# Altium PCB PQFP FPGA Fan-Out.PcbDoc
Units mil, origin at the board's own origin, x right, y up, seen from the top; angles counter-clockwise.
Board outline 1225.26 x 1034.53 mil, 2 copper layers (Top Layer, Bottom Layer); 15 components, 0 nets, 174 pads, 56 vias.
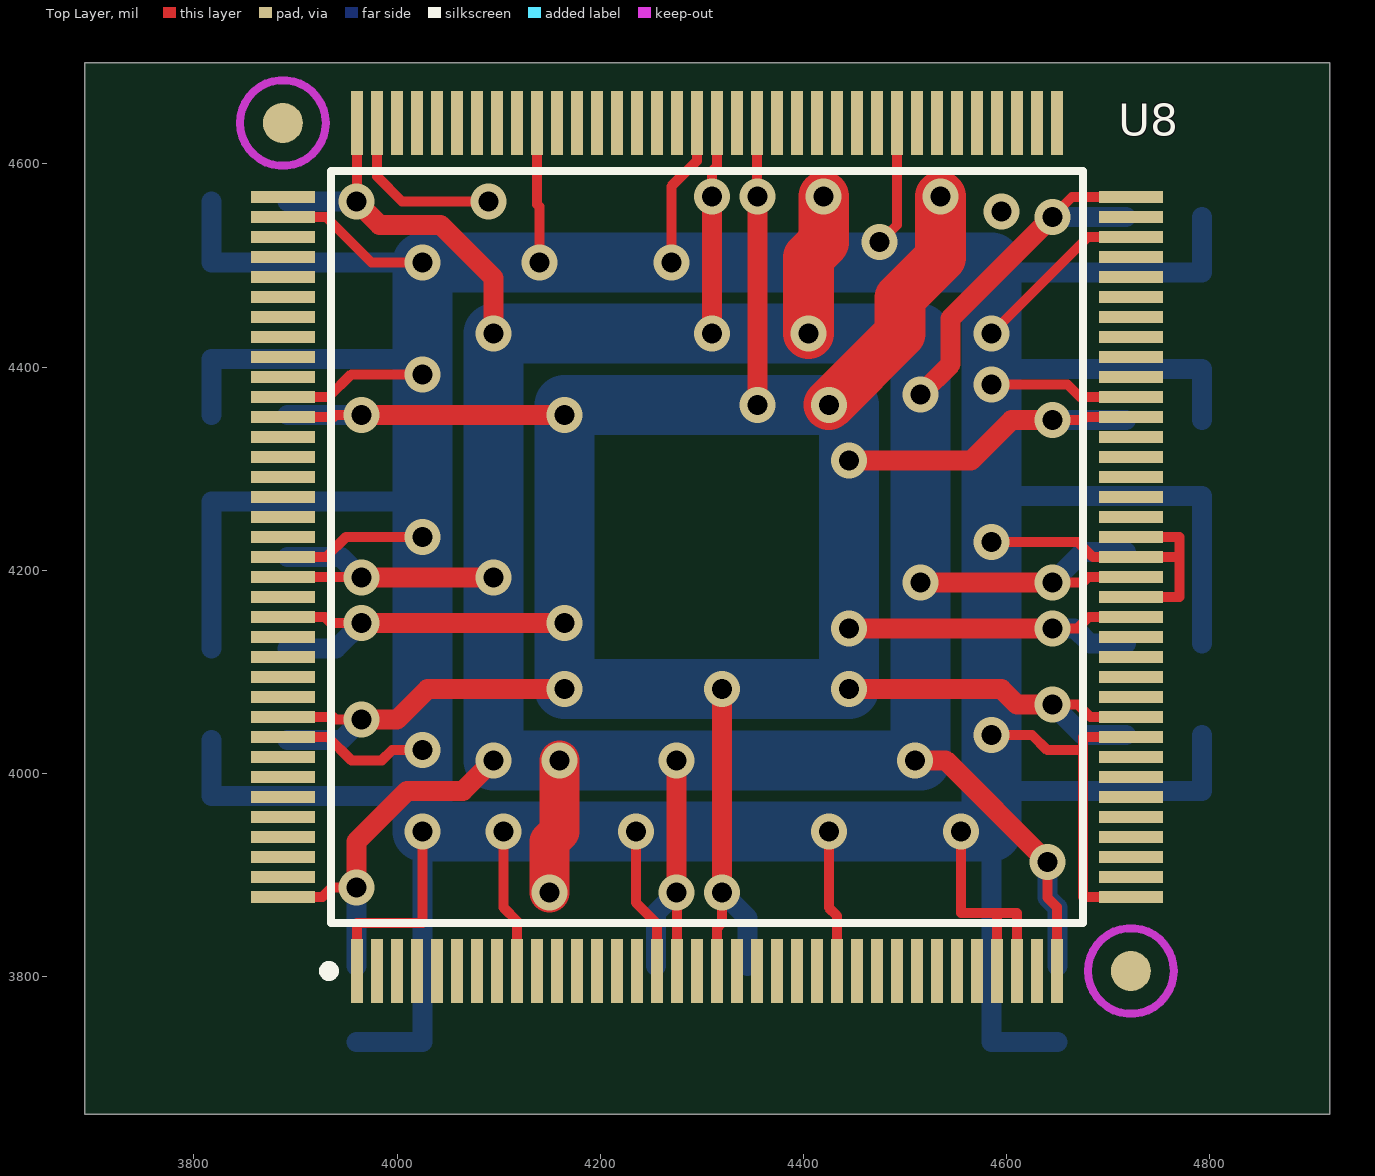
[diagram p0: Top Layer view]
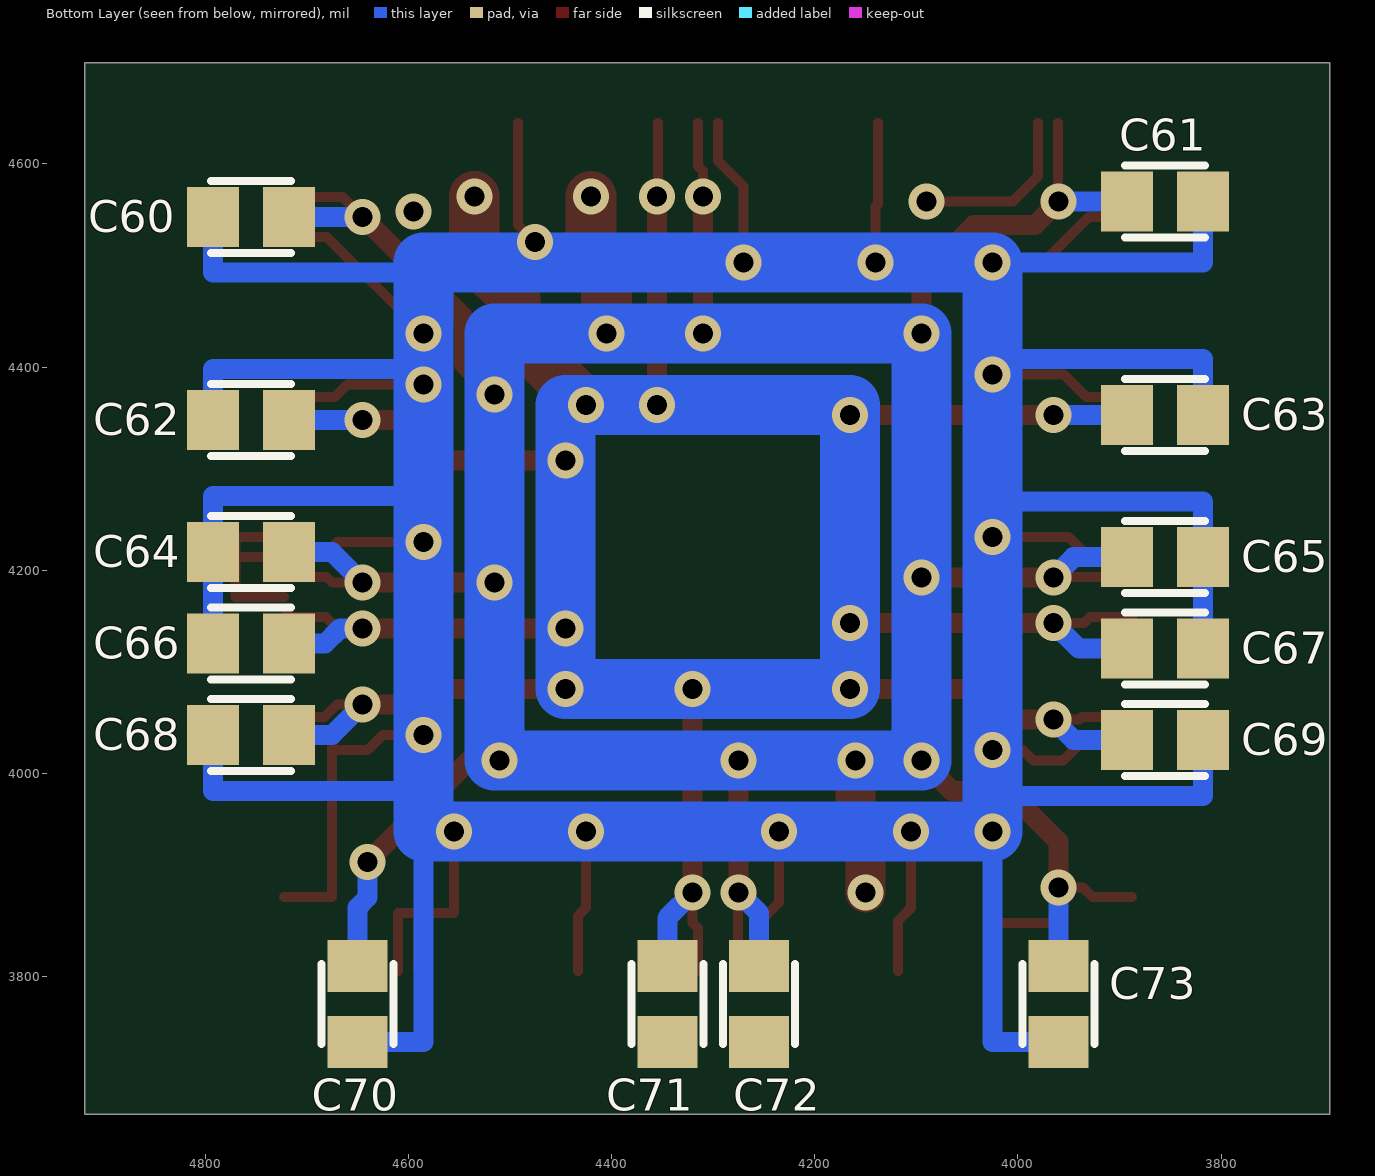
[diagram p1: Bottom Layer view, seen from below]

## Layer stack, top to bottom
Top Layer: signal copper 1.4
Dielectric: dielectric 12.6, FR-4, Dk 4.8
Bottom Layer: signal copper 1.4

## Board outline
3692.89,3664.85 4918.15,3664.85 4918.15,4699.38 3692.89,4699.38

## Design rules (kind name [scope] priority, off if disabled: settings)
Clearance [All] p1: gap=10
FabricationTestPointUsage TestPointUsage [All] p1: valid=0 allowmultiple=FALSE
FabricationTestpoint Testpoint [All] p1: side=3 testpointundercomponent=TRUE minsize=40 maxsize=100 preferedsize=60 minholesize=0 maxholesize=40 preferedholesize=32 testpointgrid=1 allowsidetop=TRUE allowsidebottom=TRUE usegrid=TRUE gridtolerance=0.01
PolygonConnect [All] p1: connectstyle=Relief reliefconductorwidth=10 reliefentries=4 polygonreliefangle="90 Angle"
RoutingVias [All] p1: holewidth=28 width=50 viastyle="Through Hole" minholewidth=28 minwidth=50 maxholewidth=28 maxwidth=50
SilkscreenOverComponentPads [All] p1: minsilkscreentomaskgap=10
SolderMaskExpansion [All] p1: expansion=4
Width [All] p1: maxlimit=10 minlimit=10 preferedwidth=10
25 further rules are at their usual default settings.

## Components (designator, comment, footprint, x,y, rotation, side; value= is the part's Value field where it differs from the comment)
C60 "100nF" CC2012-0805 4755,4548 r0 bottom
C61 "100nF" CC2012-0805 3855,4563 r180 bottom
C62 "100nF" CC2012-0805 4755,4348 r0 bottom
C63 "100nF" CC2012-0805 3855,4353 r180 bottom
C64 "100nF" CC2012-0805 4755,4218 r0 bottom
C65 "100nF" CC2012-0805 3855,4213 r180 bottom
C66 "100nF" CC2012-0805 4755,4128 r0 bottom
C67 "100nF" CC2012-0805 3855,4123 r180 bottom
C68 "100nF" CC2012-0805 4755,4038 r0 bottom
C69 "100nF" CC2012-0805 3855,4033 r180 bottom
C70 "100nF" CC2012-0805 4650,3773 r270 bottom
C71 "100nF" CC2012-0805 4345,3773 r270 bottom
C72 "100nF" CC2012-0805 4255,3773 r270 bottom
C73 "100nF" CC2012-0805 3960,3773 r270 bottom
U8 "XC2S100E-6TQ144C" TQ144 4305,4223 r90 top

## Footprints (in the part's own frame and the unit in brackets; to place one, negate y for a bottom-side part, rotate by r counter-clockwise, add the part's x,y. Pads: shape width x height; smd on the part's side, far side on the other; paste and mask are expansions set on the pad)
CC2012-0805 [mm]
  rect 1.3x1.5 smd: 1(-0.95,0) 2(0.95,0)
  silkscreen extent -1,-0.9 1,0.9
TQ144 [mm] "144-Pin Thin Quad Flat Pack (TQ144)"
  rect 1.6x0.3 smd: 1(-10.6,8.75) 2(-10.6,8.25) 3(-10.6,7.75) 4(-10.6,7.25) 5(-10.6,6.75) 6(-10.6,6.25) 7(-10.6,5.75) 8(-10.6,5.25) 9(-10.6,4.75) 10(-10.6,4.25) 11(-10.6,3.75) 12(-10.6,3.25) 13(-10.6,2.75) 14(-10.6,2.25) 15(-10.6,1.75) 16(-10.6,1.25) 17(-10.6,0.75) 18(-10.6,0.25) 19(-10.6,-0.25) 20(-10.6,-0.75) 21(-10.6,-1.25) 22(-10.6,-1.75) 23(-10.6,-2.25) 24(-10.6,-2.75) 25(-10.6,-3.25) 26(-10.6,-3.75) 27(-10.6,-4.25) 28(-10.6,-4.75) 29(-10.6,-5.25) 30(-10.6,-5.75) 31(-10.6,-6.25) 32(-10.6,-6.75) 33(-10.6,-7.25) 34(-10.6,-7.75) 35(-10.6,-8.25) 36(-10.6,-8.75) 73(10.6,-8.75) 74(10.6,-8.25) 75(10.6,-7.75) 76(10.6,-7.25) 77(10.6,-6.75) 78(10.6,-6.25) 79(10.6,-5.75) 80(10.6,-5.25) 81(10.6,-4.75) 82(10.6,-4.25) 83(10.6,-3.75) 84(10.6,-3.25) 85(10.6,-2.75) 86(10.6,-2.25) 87(10.6,-1.75) 88(10.6,-1.25) 89(10.6,-0.75) 90(10.6,-0.25) 91(10.6,0.25) 92(10.6,0.75) 93(10.6,1.25) 94(10.6,1.75) 95(10.6,2.25) 96(10.6,2.75) 97(10.6,3.25) 98(10.6,3.75) 99(10.6,4.25) 100(10.6,4.75) 101(10.6,5.25) 102(10.6,5.75) 103(10.6,6.25) 104(10.6,6.75) 105(10.6,7.25) 106(10.6,7.75) 107(10.6,8.25) 108(10.6,8.75)
  rect 0.3x1.6 smd: 37(-8.75,-10.6) 38(-8.25,-10.6) 39(-7.75,-10.6) 40(-7.25,-10.6) 41(-6.75,-10.6) 42(-6.25,-10.6) 43(-5.75,-10.6) 44(-5.25,-10.6) 45(-4.75,-10.6) 46(-4.25,-10.6) 47(-3.75,-10.6) 48(-3.25,-10.6) 49(-2.75,-10.6) 50(-2.25,-10.6) 51(-1.75,-10.6) 52(-1.25,-10.6) 53(-0.75,-10.6) 54(-0.25,-10.6) 55(0.25,-10.6) 56(0.75,-10.6) 57(1.25,-10.6) 58(1.75,-10.6) 59(2.25,-10.6) 60(2.75,-10.6) 61(3.25,-10.6) 62(3.75,-10.6) 63(4.25,-10.6) 64(4.75,-10.6) 65(5.25,-10.6) 66(5.75,-10.6) 67(6.25,-10.6) 68(6.75,-10.6) 69(7.25,-10.6) 70(7.75,-10.6) 71(8.25,-10.6) 72(8.75,-10.6) 109(8.75,10.6) 110(8.25,10.6) 111(7.75,10.6) 112(7.25,10.6) 113(6.75,10.6) 114(6.25,10.6) 115(5.75,10.6) 116(5.25,10.6) 117(4.75,10.6) 118(4.25,10.6) 119(3.75,10.6) 120(3.25,10.6) 121(2.75,10.6) 122(2.25,10.6) 123(1.75,10.6) 124(1.25,10.6) 125(0.75,10.6) 126(0.25,10.6) 127(-0.25,10.6) 128(-0.75,10.6) 129(-1.25,10.6) 130(-1.75,10.6) 131(-2.25,10.6) 132(-2.75,10.6) 133(-3.25,10.6) 134(-3.75,10.6) 135(-4.25,10.6) 136(-4.75,10.6) 137(-5.25,10.6) 138(-5.75,10.6) 139(-6.25,10.6) 140(-6.75,10.6) 141(-7.25,10.6) 142(-7.75,10.6) 143(-8.25,10.6) 144(-8.75,10.6)
  round 1 smd paste-0.55 mask+1: FID1(-10.6,-10.6) FID2(10.6,10.6)
  Top Layer keep-out circle w0.2: c-10.6,-10.6 r1.072
  Top Layer keep-out circle w0.2: c10.6,10.6 r1.072
  silkscreen extent -10.72,-9.4 9.4,9.57

## Part data
C60 C61 C62 C63 C64 C65 C66 C67 C68 C69 C70 C71 C72 C73: library part CAP, "Capacitor"
U8: "Spartan-IIE 1.8V FPGA, 144-Pin TQFP, Standard Performance, Commercial Grade"

## Via types
v1: diameter 35.43, hole 19.68, Top Layer to Bottom Layer, 55 vias
v2: diameter 35.43, hole 19.68, Top Layer to Bottom Layer, tented both sides, 1 vias

## Nets (pads, with @x,y where several pads share a name; then routed paths per layer and width w, separated by ;. In a path a pad name is that pad's centre, name@x,y a point inside that pad or via, vN(x,y) a via of type N, cw(c..) or ccw(c..) an arc to the next point about the centre after c; other vN are vias at no path point)
pads on no net: C60.1 C60.2 C61.1 C61.2 C62.1 C62.2 C63.1 C63.2 C64.1 C64.2 C65.1 C65.2 C66.1 C66.2 C67.1 C67.2 C68.1 C68.2 C69.1 C69.2 C70.1 C70.2 C71.1 C71.2 C72.1 C72.2 C73.1 C73.2 U8.1 U8.2 U8.3 U8.4 U8.5 U8.6 U8.7 U8.8 U8.9 U8.10 U8.11 U8.12 U8.13 U8.14 U8.15 U8.16 U8.17 U8.18 U8.19 U8.20 U8.21 U8.22 U8.23 U8.24 U8.25 U8.26 U8.27 U8.28 U8.29 U8.30 U8.31 U8.32 U8.33 U8.34 U8.35 U8.36 U8.37 U8.38 U8.39 U8.40 U8.41 U8.42 U8.43 U8.44 U8.45 U8.46 U8.47 U8.48 U8.49 U8.50 U8.51 U8.52 U8.53 U8.54 U8.55 U8.56 U8.57 U8.58 U8.59 U8.60 U8.61 U8.62 U8.63 U8.64 U8.65 U8.66 U8.67 U8.68 U8.69 U8.70 U8.71 U8.72 U8.73 U8.74 U8.75 U8.76 U8.77 U8.78 U8.79 U8.80 U8.81 U8.82 U8.83 U8.84 U8.85 U8.86 U8.87 U8.88 U8.89 U8.90 U8.91 U8.92 U8.93 U8.94 U8.95 U8.96 U8.97 U8.98 U8.99 U8.100 U8.101 U8.102 U8.103 U8.104 U8.105 U8.106 U8.107 U8.108 U8.109 U8.110 U8.111 U8.112 U8.113 U8.114 U8.115 U8.116 U8.117 U8.118 U8.119 U8.120 U8.121 U8.122 U8.123 U8.124 U8.125 U8.126 U8.127 U8.128 U8.129 U8.130 U8.131 U8.132 U8.133 U8.134 U8.135 U8.136 U8.137 U8.138 U8.139 U8.140 U8.141 U8.142 U8.143 U8.144 U8.FID1 U8.FID2
copper on no net: | length 16875.3
  Top Layer w9.84: 3887.68,3878.51 3925.51,3878.51 ; 3887.68,4035.99 3932.01,4035.99 3955,4013 3985,4013 3995,4023 v1(4025,4023) ; 3887.68,4055.68 3937.32,4055.68 3940,4053 v1(3965,4053) ; 3887.68,4154.1 3928.9,4154.1 3935,4148 v1(3965,4148) ; 3887.68,4193.47 v1@3964.53,4193.47 ; 3887.68,4213.16 3930.16,4213.16 3950,4233 v1(4025,4233) ; 3887.68,4350.95 3937.95,4350.95 3940,4353 v1(3965,4353) ; 3887.68,4370.64 3932.64,4370.64 3955,4393 v1(4025,4393) ; 3887.68,4547.8 3930.2,4547.8 3975,4503 v1(4025,4503) ; 3926.51,3878.51 3936,3888 v1(3960,3888) ; 3960.51,3805.68 3960.51,3853 4025,3853 v1(4025,3943) ; v1@3960.51,4563 3960.51,4640.32 ; 3980.2,4640.32 3980.2,4587.8 4005,4563 v2(4090,4563) ; v1(4105,3943) 4105,3868 4117.99,3855.01 4117.99,3805.68 ; 4137.68,4640.32 4137.68,4560.32 4140,4558 v1(4140,4503) ; v1(4235,3943) 4235,3873 4255.79,3852.21 4255.79,3805.68 ; v1(4270,4503) 4270,4578 4295.16,4603.16 4295.16,4640.32 ; 4275.47,3805.68 v1@4275.47,3883 ; v1(4310,4568) 4310,4593 4314.84,4597.84 4314.84,4640.32 ; 4314.84,3805.68 4314.84,3847.84 4320,3853 v1(4320,3883) ; v1@4354.21,4568.79 4354.21,4640.32 ; v1(4425,3943) 4425,3868 4432.95,3860.05 4432.95,3805.68 ; v1(4475,4523) 4492.01,4540.01 4492.01,4640.32 ; v1(4555,3943) 4555,3863 4610.12,3863 4610.12,3805.68 ; v1(4585,4038) 4625,4038 4640,4023 4675,4023 ; v1(4585,4228) 4670,4228 4684.84,4213.16 4770,4213.16 ; v1(4585,4383) 4660,4383 4672.36,4370.64 4722.32,4370.64 ; v1(4585,4433) 4680.12,4528.12 4722.32,4528.12 ; 4590.43,3805.68 4590.43,3863 ; v1(4640,3913) 4640,3878 4649.49,3868.51 4649.49,3805.68 ; v1(4645,4068) 4670,4068 4682.32,4055.68 4722.32,4055.68 ; v1(4645,4143) 4670,4143 4681.1,4154.1 4722.32,4154.1 ; v1(4645,4188) 4675,4188 4680.47,4193.47 4722.32,4193.47 ; v1(4645,4348) 4675,4348 4677.95,4350.95 4722.32,4350.95 ; v1(4645,4548) 4664.49,4567.49 4722.32,4567.49 ; 4722.32,3878.51 4675,3878.51 4675,4035.99 4722.32,4035.99 ; 4722.32,4173.79 4770,4173.79 4770,4232.84 4722.32,4232.84
  Top Layer w19.68: v1(3960,3888) 3960,3933 4010,3983 4065,3983 v1(4095,4013) ; v1(3960,4563) 3983,4540 4043,4540 4095,4488 v1(4095,4433) ; v1(3965,4053) 4000,4053 4030,4083 v1(4165,4083) ; v1(3965,4148) v1(4165,4148) ; v1(3965,4193) v1(4095,4193) ; v1(3965,4353) v1(4165,4353) ; v1(4275,3883) v1(4275,4013) ; v1(4310,4433) v1(4310,4568) ; v1(4320,3883) v1(4320,4083) ; v1(4355,4363) v1(4355,4568) ; v1(4445,4083) 4595,4083 4610,4068 v1(4645,4068) ; v1(4445,4143) v1(4645,4143) ; v1(4445,4308) 4565,4308 4605,4348 v1(4645,4348) ; v1(4510,4013) 4540,4013 v1(4640,3913) ; v1(4515,4188) v1(4645,4188) ; v1(4515,4373) 4545,4403 4545,4448 v1(4645,4548)
  Top Layer w39.37: v1(4150,3883) 4150,3933 4160,3943 v1(4160,4013)
  Top Layer w50: v1(4405,4433) 4405,4508 4420,4523 v1(4420,4568) ; v1(4425,4363) 4495,4433 4495,4468 4535,4508 v1(4535,4568)
  Bottom Layer w19.68: 3817.6,4033 3817.6,3978 4025,3978 ; 3817.6,4123 3817.6,4268 4025,4268 ; 3817.6,4353 3817.6,4408 v1@4025,4408 ; 3817.6,4563 3817.6,4503 v1(4025,4503) ; 3892.4,4033 3945,4033 v1(3965,4053) ; 3892.4,4123 3940,4123 v1(3965,4148) ; 3892.4,4213 3945,4213 v1(3965,4193) ; 3892.4,4353 v1(3965,4353) ; 3892.4,4563 v1(3960,4563) ; 3960,3735.6 4025,3735.6 v1(4025,3943) ; 3960,3810.4 v1(3960,3888) ; 4255,3810.4 4255,3863 v1(4275,3883) ; v1(4320,3883) 4345,3858 4345,3810.4 ; 4585,3943 4585,3735.6 4650,3735.6 ; 4585,3983 4792.4,3983 4792.4,4038 ; 4585,4273 4792.4,4273 4792.4,4128 ; v1@4585,4398 4792.4,4398 4792.4,4348 ; 4585,4493 4792.4,4493 4792.4,4548 ; v1(4640,3913) 4640,3878 4650,3868 4650,3810.4 ; v1(4645,4068) 4675,4038 4717.6,4038 ; v1(4645,4143) 4667,4143 4682,4128 4717.6,4128 ; v1(4645,4188) 4675,4218 4717.6,4218 ; v1(4645,4348) 4717.6,4348 ; v1(4645,4548) 4717.6,4548
  Bottom Layer w59.06: v1(4510,4013) v1(4095,4013) v1(4095,4433) 4515,4433 v1@4515,4013 ; v1(4025,3943) v1(4025,4503) 4585,4503 4585,3943 v1(4025,3943) ; v1(4165,4083) v1(4445,4083) 4445,4363 4165,4363 v1(4165,4083)
  other v1: 4595,4553